# Altium PCB PCB2.PcbDoc
Units mm, origin at the board's own origin, x right, y up, seen from the top; angles counter-clockwise.
Board outline 83.06 x 42.93 mm, 2 copper layers (Top Layer, Bottom Layer); 50 components, 50 nets, 222 pads, 83 vias.
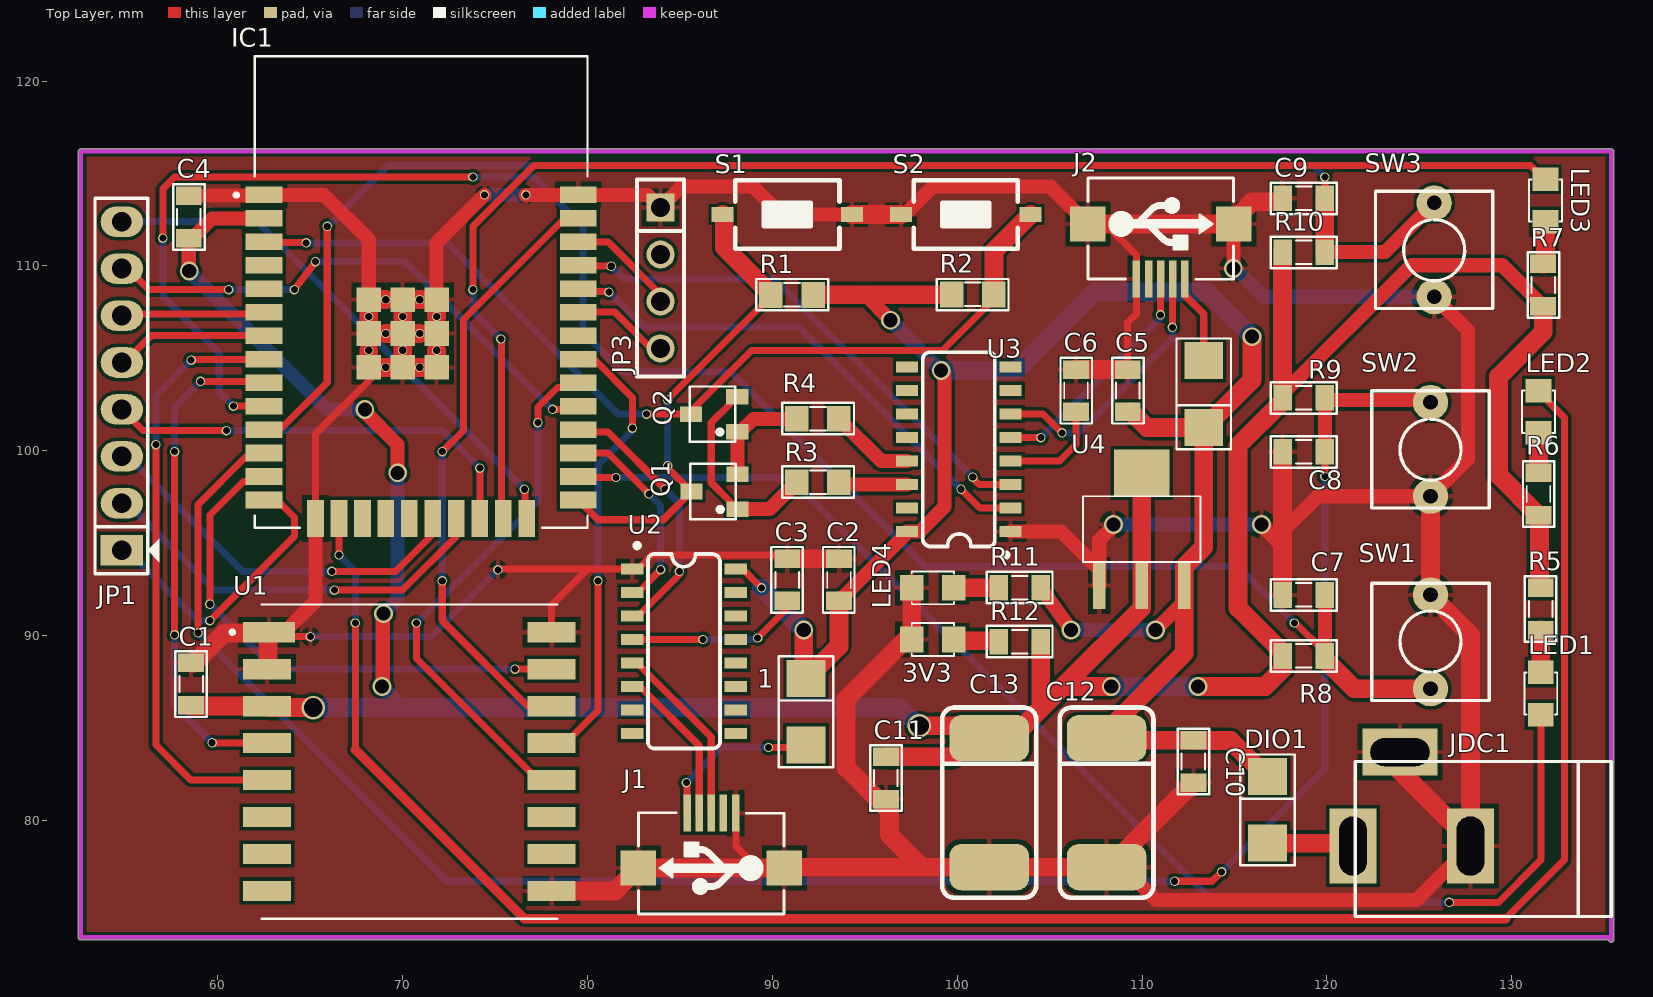
[diagram p0: Top Layer view]
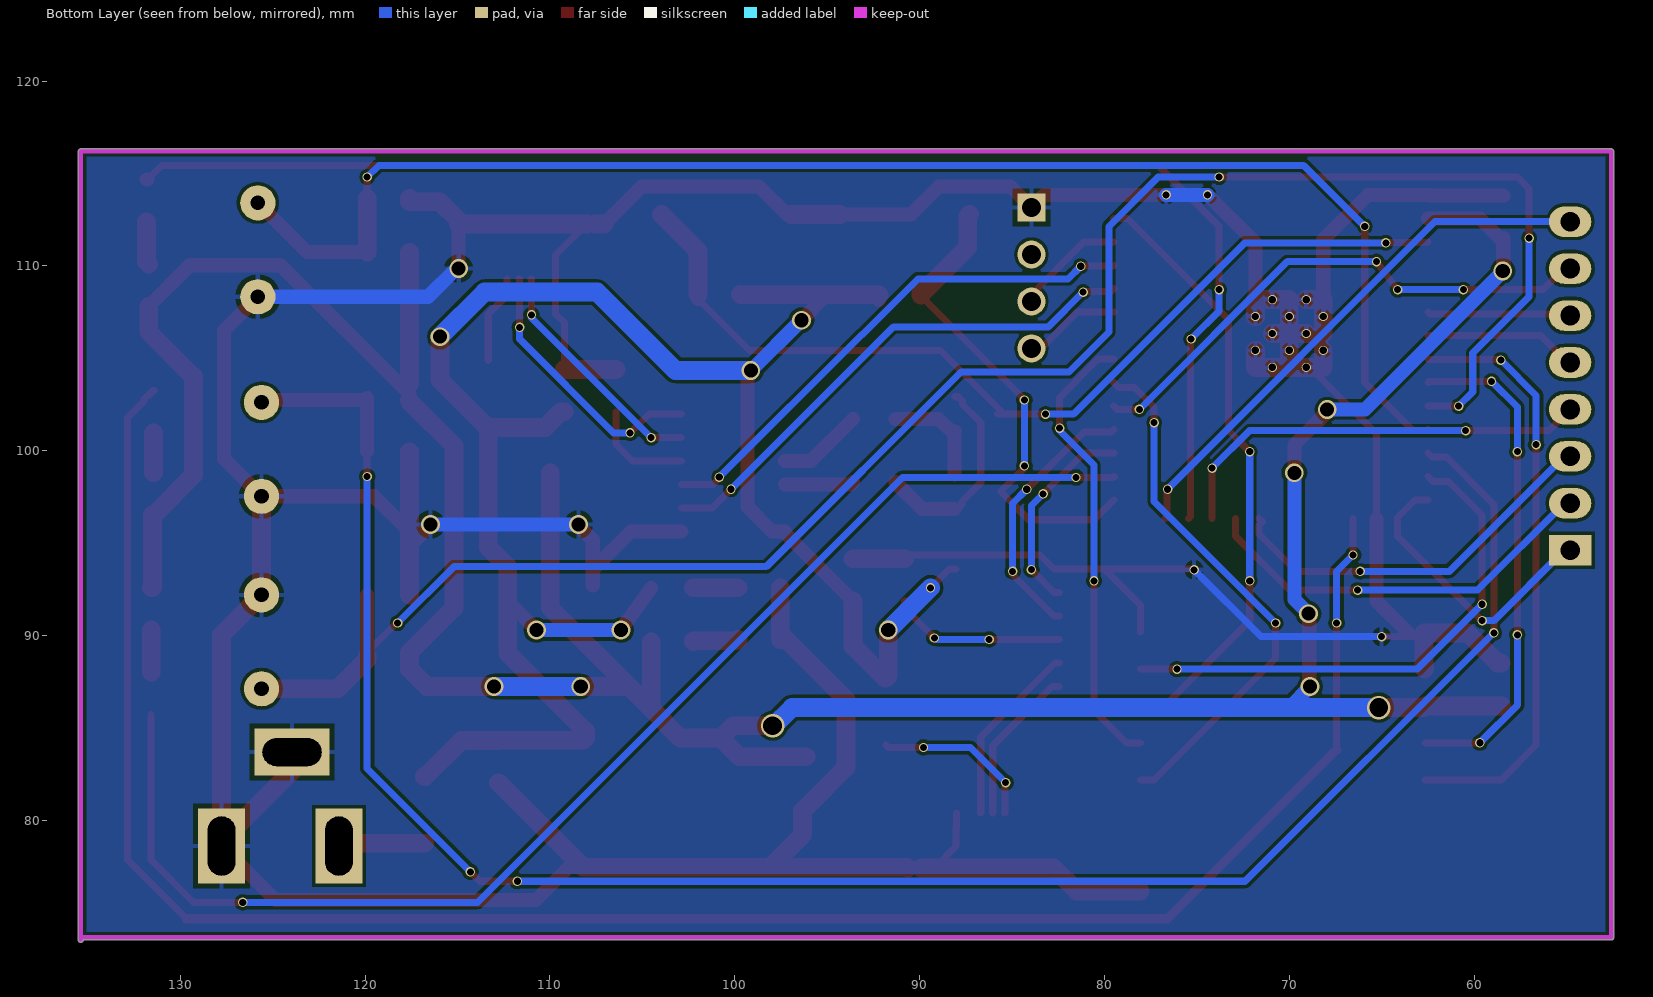
[diagram p1: Bottom Layer view, seen from below]
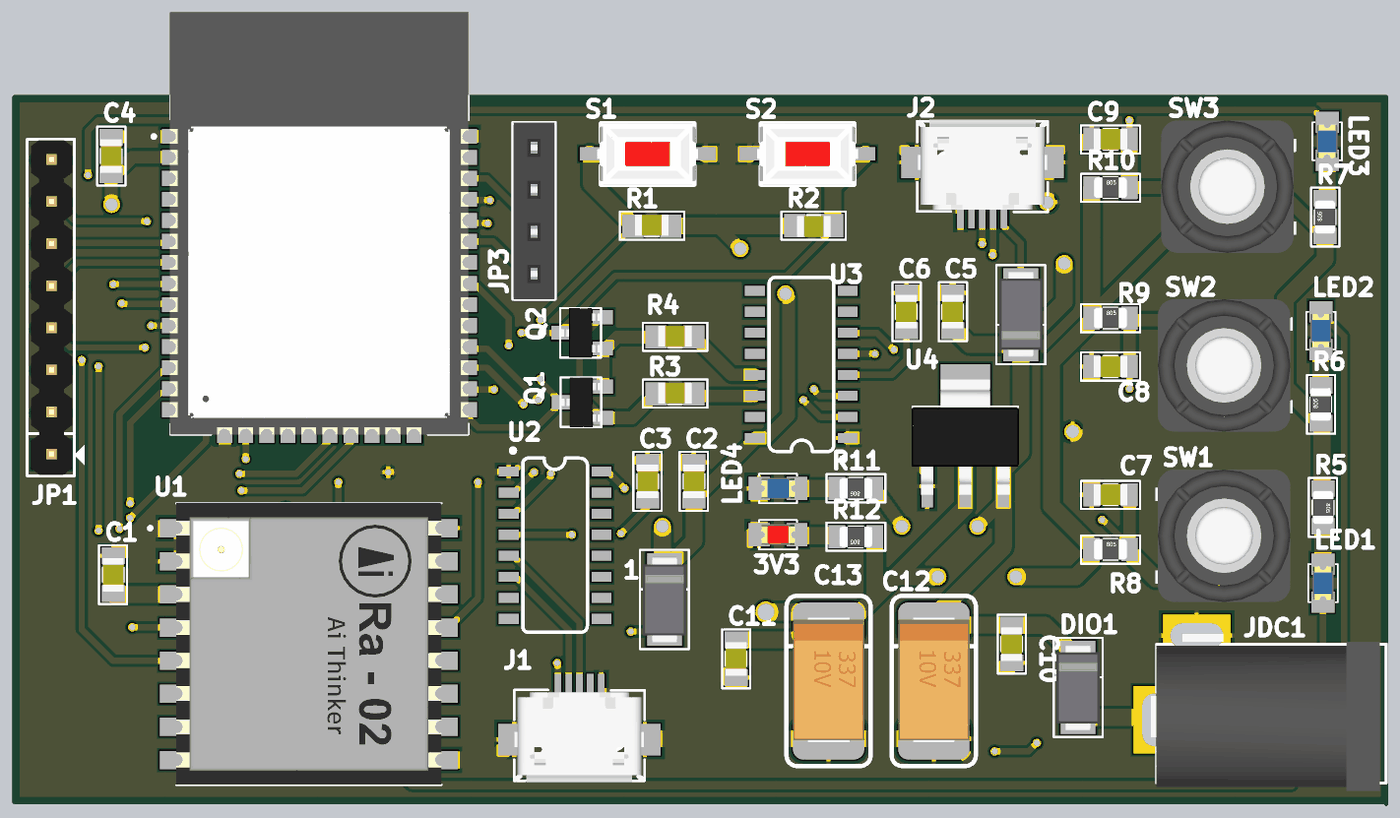
[diagram p2: 3D render of the assembled board from above, using the file's embedded part models]

## Layer stack, top to bottom
Top Solder: solder mask 0.0102, Solder Resist, Dk 3.5
Top Layer: signal copper 0.0356
Dielectric 1: dielectric 0.32, FR-4, Dk 4.8
Bottom Layer: signal copper 0.0356
Bottom Solder: solder mask 0.0102, Solder Resist, Dk 3.5

## Board outline
52.451,73.66 52.451,73.661 52.451,116.205 cw(c52.578,116.205) 52.578,116.332 135.382,116.332 cw(c135.382,116.205) 135.509,116.205 135.509,73.533 cw(c135.382,73.533) 135.255,73.533 52.578,73.533 cw(c52.578,73.66)

## Design rules (kind name [scope] priority, off if disabled: settings)
Clearance [All] p1: gap=0.178 ignorepadtopadclearanceinfootprint=FALSE
PolygonConnect [All] p1: connectstyle=Relief reliefconductorwidth=0.254 reliefentries=4 polygonreliefangle="90 Angle" airgapwidth=0.254
RoutingVias [All] p1: holewidth=0.762 width=1.016 viastyle="Through Hole" minholewidth=0.381 minwidth=0.508 maxholewidth=1.016 maxwidth=1.27
SolderMaskExpansion [All] p1: expansion=0.102
Width [All] p1: maxlimit=1.016 minlimit=0.381 preferedwidth=0.762
30 further rules are at their usual default settings.

## Classes and differential pairs
component class POWER: 3V3 C10 C11 C12 C13 DIO1 JDC1 LED4 R11 R12 U4
component class MCU: C4 C5 C6 C7 C8 C9 IC1 J2 JP1 LED1 LED2 LED3 Q1 Q2 R1 R2 R3 R4 R5 R6 R7 R8 R9 R10 S1 S2 SW1 SW2 SW3
component class LORA: 1 C1 C2 C3 J1 U1 U2
component class HMI: JP3

## Components (designator, comment, footprint, x,y, rotation, side; value= is the part's Value field where it differs from the comment)
1 "S4" DIO-214AC(SMA) 91.872,85.954 r270 top
3V3 "LED" LED-0805-Red 99.822,89.789 r180 top value="LED 3 ly Single Colour" (schematic designator LED5)
C1 "104" CAP_0805 58.547,87.376 r270 top value=33p
C2 "104" CAP_0805 93.599,93.015 r270 top value=33p
C3 "104" CAP_0805 90.805,93.015 r270 top value=33p
C4 "104" CAP_0805 58.42,112.649 r90 top value=33p
C5 "10uF" CAP_0805 109.22,103.251 r90 top value=33p
C6 "100nF" CAP_0805 106.426,103.251 r90 top value=33p
C7 "10uF" CAP_0805 118.745,92.202 r0 top value=33p
C8 "10uF" CAP_0805 118.745,99.949 r0 top value=33p
C9 "10uF" CAP_0805 118.745,113.665 r0 top value=33p
C10 "220nF" CAP_0805 112.776,83.185 r90 top value=33p
C11 "100nF" CAP_0805 96.139,82.296 r90 top value=33p
C12 "220uF" CAP_7343 108.077,81.026 r270 top
C13 "220uF" CAP_7343 101.727,81.026 r270 top
DIO1 "Diode SMD" DIO-214AC(SMA) 116.84,80.645 r270 top value=1N5007
IC1 "ESP32-WROOM-32" MODULE_ESP32-WROOM-32 70.993,108.585 r0 top
J1 "USB-5" USB-M1 86.69,80.391 r180 top
J2 "USB-5" USB-M1 111.011,109.3 r0 top
JDC1 "Jac DC" DC-IN 124.587,81.153 r180 top
JP1 "JP8 PIN" JP8 54.8,94.615 r90 top value=JP7
JP3 "JP4" JP4-C1T 83.947,113.157 r270 top
LED1 "LED" LED-0805-Blue 131.572,88.011 r270 top value="LED 3 ly Single Colour"
LED2 "LED" LED-0805-Blue 131.445,100.965 r90 top value="LED 3 ly Single Colour"
LED3 "LED" LED-0805-Blue 131.826,112.395 r90 top value="LED 3 ly Single Colour"
LED4 "LED" LED-0805-Blue 99.822,92.583 r180 top value="LED 3 ly Single Colour"
Q1 "2SC1815" SOT23D 86.868,97.79 r90 top value=C1815
Q2 "2SC1815" SOT23D 86.848,101.981 r90 top value=C1815
R1 "10k" SM-0805 91.059,108.433 r180 top value=1K
R2 "10K" SM-0805 100.838,108.458 r0 top value=1K
R3 "10K" SM-0805 92.456,98.298 r180 top value=1K
R4 "10k" SM-0805 92.456,101.727 r180 top value=1K
R5 "10K" RES-SMD-0805 131.572,91.44 r270 top
R6 "10K" RES-SMD-0805 131.445,97.663 r90 top
R7 "10K" RES-SMD-0805 131.699,108.966 r90 top
R8 "10K" RES-SMD-0805 118.745,88.9 r0 top
R9 "10K" RES-SMD-0805 118.745,102.87 r0 top
R10 "10K" RES-SMD-0805 118.745,110.744 r0 top
R11 "Resistor - SMD" RES-SMD-0805 103.378,92.583 r180 top
R12 "1K" RES-SMD-0805 103.378,89.662 r180 top
S1 "SW-SMD" SW-SMD 90.805,112.776 r0 top
S2 "SW-SMD" SW-SMD 100.457,112.776 r180 top
SW1 "SW" SW2 125.603,92.202 r270 top value="SW chip 2 pin"
SW2 "SW" SW2 125.603,97.536 r90 top value="SW chip 2 pin"
SW3 "SW" SW2 125.803,108.331 r90 top value="SW chip 2 pin"
U1 "Ra-02 LoRa" Ra-02 70.358,83.185 r0 top
U2 "CH340C" SOP-16 85.217,89.154 r270 top
U3 "CH340C" SOP-16 100.082,100.076 r90 top
U4 "LM1117-ADJ" LM1117-SOP 109.982,93.98 r0 top
? "S4" DIO-214AC(SMA) 113.284,102.997 r90 top

## Footprints (in the part's own frame and the unit in brackets; to place one, negate y for a bottom-side part, rotate by r counter-clockwise, add the part's x,y. Pads: shape width x height; smd on the part's side, far side on the other; paste and mask are expansions set on the pad)
CAP_0805 [mil]
  rect 39.37x55 smd: 1(-45,0) 2(45,0)
  silkscreen extent -70,-34 70,33, body extent -40,-25 40,25, height 24
CAP_7343 [mm] "Capacitor Tantalum 7343"
  rrect50% 2.5x4.3 smd: 1(-3.429,0) 2(3.556,0)
  silkscreen extent -5.08,-2.54 5.21,2.54, body extent -3.75,-2.14 3.75,2.16, height 2.8
DC-IN [mm] "Jac DC input"
  rect 2.54x4.064 hole 1.5 slot 3.2 at 90 deg: 1(3.175,2.54) 2(-3.175,2.54)
  rect 4.064x2.54 hole 1.5 slot 3.2 at 0 deg: 3(0.635,-2.54)
  silkscreen extent -10.8,-2.03 3.05,6.35, body extent -10.42,-2.67 3.4,6.84, height 11.02
DIO-214AC(SMA) [mm] "DO-214AC Diode Smallest Size"
  rect 2x2.1 smd: 1(1.88,-0.051) 2(-1.732,-0.051)
  silkscreen extent -2.92,-1.52 3.07,1.42, body extent -2.5,-1.35 2.7,1.25, height 2.4
JP4-C1T [mm] "4 row, straight, gold plating"
  rect 1.52x1.52 hole 1.02: 1(0,0)
  round 1.52 hole 1.02: 2(2.54,0) 3(5.08,0) 4(7.62,0)
  silkscreen extent -1.52,-1.27 9.14,1.27, body extent -1.52,-1.25 9.14,1.25, height 8.51
JP8 [mil] "JP8"
  rect 65x90 hole 42: 1(0,0)
  oval 65x90 hole 42: 2(100,0) 3(200,0) 4(300,0) 5(400,0) 6(500,0) 7(600,0) 8(700,0)
  silkscreen extent -50,-80 750,57, body extent -48,-50 748,48, height 354
LED-0805-Blue [mil]
  rect 50x55 smd: 1(0,0) 2(90,0)
  silkscreen extent 0,-35 90,35, body extent 5,-25 85,25, height 43
LED-0805-Red [mil]
  rect 50x55 smd: 1(0,0) 2(90,0)
  silkscreen extent 0,-35 90,35, body extent 5,-25 85,25, height 43
LM1117-SOP [mm]
  rect 0.7x2.54 smd: 1(-2.3,-1.27) 2(0,-1.27) 3(2.3,-1.27)
  rect 3x2.54 smd: 2(0,4.826)
  silkscreen extent -3.17,0 3.17,3.56, body extent -3.25,-1.78 3.25,5.18, height 1.68
MODULE_ESP32-WROOM-32 [mm]
  rect 2x0.9 smd: 1(-8.5,5.26) 2(-8.5,3.99) 3(-8.5,2.72) 4(-8.5,1.45) 5(-8.5,0.18) 6(-8.5,-1.09) 7(-8.5,-2.36) 8(-8.5,-3.63) 9(-8.5,-4.9) 10(-8.5,-6.17) 11(-8.5,-7.44) 12(-8.5,-8.71) 13(-8.5,-9.98) 14(-8.5,-11.25) 25(8.5,-11.25) 26(8.5,-9.98) 27(8.5,-8.71) 28(8.5,-7.44) 29(8.5,-6.17) 30(8.5,-4.9) 31(8.5,-3.63) 32(8.5,-2.36) 33(8.5,-1.09) 34(8.5,0.18) 35(8.5,1.45) 36(8.5,2.72) 37(8.5,3.99) 38(8.5,5.26)
  rect 0.9x2 smd: 15(-5.715,-12.25) 16(-4.445,-12.25) 17(-3.175,-12.25) 18(-1.905,-12.25) 19(-0.635,-12.25) 20(0.635,-12.25) 21(1.905,-12.25) 22(3.175,-12.25) 23(4.445,-12.25) 24(5.715,-12.25)
  rect 1.33x1.33 smd: 39_1(-2.835,-0.405) 39_2(-1,-0.405) 39_3(0.835,-0.405) 39_4(-2.835,-2.24) 39_5(-1,-2.24) 39_6(0.835,-2.24) 39_7(-2.835,-4.075) 39_8(-1,-4.075) 39_9(0.835,-4.075)
  round 0.5 hole 0.4: 39_10(-1.917,-0.405) 39_11(-0.082,-0.405) 39_12(-2.835,-1.322) 39_13(-1,-1.322) 39_14(0.835,-1.322) 39_15(-1.917,-2.24) 39_16(-0.082,-2.24) 39_17(-2.835,-3.157) 39_18(-1,-3.157) 39_19(0.835,-3.157) 39_20(-1.917,-4.075) 39_21(-0.082,-4.075)
  silkscreen extent -10.1,-12.75 9,12.75, body extent -10.54,-12.75 8.98,12.75, height 3.2
Ra-02 [mm]
  rect 2.8x1.1 smd: 1(-7.6,7)
  rect 2.6x1.1 smd: 2(-7.7,5) 3(-7.7,3) 4(-7.7,1) 5(-7.7,-1) 6(-7.7,-3) 7(-7.7,-5) 8(-7.7,-7) 9(7.7,-7) 10(7.7,-5) 11(7.7,-3) 12(7.7,-1) 13(7.7,1) 14(7.7,3) 15(7.7,5) 16(7.7,7)
  silkscreen extent -9.68,-8.5 8,8.5, body extent -8,-8.49 8,8.51, height 3.03
RES-SMD-0805 [mil]
  rect 39.37x55 smd: 1(-45,0) 2(45,0)
  silkscreen extent -70,-34 70,33, body extent -39,-25 39,25, height 31
SM-0805 [mil] "Compoment SMD 80x50mil"
  rect 50x55 smd: 1(-45,0) 2(45,0)
  silkscreen extent -77,-34 76,33, body extent -40,-27 40,23, height 24
SOP-16 [mm]
  rect 0.6x1.2 smd: 1(-4.445,-2.8) 2(-3.175,-2.8) 3(-1.905,-2.8) 4(-0.635,-2.8) 5(0.635,-2.8) 6(1.905,-2.8) 7(3.175,-2.8) 8(4.445,-2.8) 9(4.445,2.8) 10(3.175,2.8) 11(1.905,2.8) 12(0.635,2.8) 13(-0.635,2.8) 14(-1.905,2.8) 15(-3.175,2.8) 16(-4.445,2.8)
  silkscreen extent -5.84,-2.67 5.26,1.95, body extent -4.95,-3.47 4.95,3.47, height 1.75
SOT23D [mm] "SOT 23C - 1-3-2 - BCE"
  rect 0.85x1.2 smd: 1(-0.95,-1.25) 2(0.94,-1.245) 3(0,1.25)
  silkscreen extent -1.5,-1.14 1.5,1.32, body extent -1.5,-1.17 1.5,1.33, height 1.06
SW2 [mil] "SW button 2pin, 250x 250 mil"
  round 75 hole 31: 1(0,0) 2(200,0)
  silkscreen extent -25,-125 225,125, body extent -60,-163 255,157, height 257
SW-SMD [mm] "Switch SMD type"
  rect 1.2x0.8 smd: 1(-3.5,0) 2(3.5,0)
  silkscreen extent -2.82,-1.85 2.82,1.85, body extent -3.05,-1.85 3.05,1.85, height 2.5
USB-M1 [mm]
  rect 0.4x2 smd: 1(1.3,0) 2(0.65,0) 3(0,0) 4(-0.65,0) 5(-1.321,0)
  rect 1.9x1.9 smd: 5(-3.95,2.968) 5(3.95,2.968)
  silkscreen extent -3.94,-0.03 3.94,5.46, body extent -3.98,0.11 4,5.54, height 2.71

## Part data
1 ?: library part "Diode S4", "Dán", Chung_Loai=Dán, Don_Vi=Con, Ma_Hang=MH005519, Ten_Linh_Kien="Diode S4 SOD123 ( 1N5819 SOD123)"
3V3 LED1 LED2 LED3 LED4: "LED Single colour Green and Red"
C1 C2 C3 C4 C5 C6 C7 C8 C9 C10 C11: library part CapSMD, "Capacitor", LatestRevisionDate=17-Jul-2002, LatestRevisionNote="Re-released for DXP Platform.", PackageReference=RAD-0.3, Published=8-Jun-2000, Publisher="Altium Limited"
C12 C13: library part CAP_TAN_SMD, "Polazied Tantalum Capacitor"
DIO1: "Default Diode", Code - JEDEC=DO-214-AB, Published=8-Jun-2000, Publisher="Altium Limited", Revision="July-2002: Re-released for DXP Platform."
IC1: "Bluetooth, WiFi Transceiver Module 2.4GHz ~ 2.5GHz Surface Mount", Package="Module Espressif Systems", Digi-Key_Part_Number=1904-1010-1-ND, Digi-Key_Purchase_URL=https://www.digikey.com/product-detail/en/espressif-systems/ESP32-WROOM-32/1904-1010-1-ND/8544305?utm_source=snapeda&utm_medium=aggregator&utm_campaign=symbol, MF="Espressif Systems", MP=ESP32-WROOM-32, SnapEDA_Link=https://www.snapeda.com/parts/ESP32-WROOM-32/Espressif%20Systems/view-part/2753322/?ref=snap
J1 J2: Manufacturer=FCI, Manufacturer Part Number=10118193-0001LF, Supplier Part Number 1=609-4616-1-ND, .Checked PCB=RF, .Checked SCH=MM, .Creator=MM, Category="Connectors, Interconnects", ComponentLink1Description=http://portal.fciconnect.com/Comergent//fci/drawing/10118193.pdf, ComponentLink1URL=http://portal.fciconnect.com/Comergent//fci/drawing/10118193.pdf, Connector Type="USB - micro B", Features="Shielded, Solder Retention", Gender=Receptacle, Ingress Protection=-, Mounting Type="Surface Mount, Right Angle, Horizontal", Number of Contacts=5, Packaging="Cut Tape (CT)", Pricing 1="1=0.46, 10=0.433, 25=0.3712, 50=0.3156, 100=0.3032, 250=0.27224, 500=0.25988 (USD)", RoHS="RoHS Compliant", Specifications="USB 2.0", Stock 1=28642, Supplier 1=Digi-Key
JDC1: library part DCIN, "Jac DC input"
JP1: library part JP8
JP3: "WR-PHD 2.54 mm Angled Socket Header", Manufacturer="W¨¹rth Elektronik eiSos GmbH", partNo=613004143121, ComponentLink1 Description=Manufacturer, ComponentLink1URL=http://www.we-online.com, ComponentLink2 Description=Datasheet, ComponentLink2URL=http://katalog.we-online.de/em/datasheet/6130xx143121.pdf, Created by="Karrer Zheng", Created Date="29 March 2013", NoPins=04
Q1 Q2: library part C1815, "NPN 600mW, ECB", =C828
R1 R2 R3 R4: library part RM, "Resistor SMD"
R5 R6 R7 R8 R9 R10 R12: library part "Resistor - SMD", "Resistor SMD", Manufacturer="Generic Components", Class=Passive, Published=08/06/2000, Publisher="Altium Hobart Technology Centre"
R11: "Resistor SMD", Manufacturer="Generic Components", Class=Passive, Published=08/06/2000, Publisher="Altium Hobart Technology Centre"
S1 S2: "Switch", LatestRevisionDate=17-Jul-2002, LatestRevisionNote="Re-released for DXP Platform.", PackageReference=SPST-2, Published=24-Mar-1999, Publisher="Altium Limited"
SW1 SW2 SW3: library part SW2, "Switch button 2 pin"
U1: "LoRa Module Ra-02"
U2 U3: "USB to serial chip CH340", Package=Package, Availability=Unavailable, Check_prices=https://www.snapeda.com/parts/CH340C/WCH/view-part/5428851/?ref=eda, MF=WCH, MP=CH340C, Price=None, SnapEDA_Link=https://www.snapeda.com/parts/CH340C/WCH/view-part/5428851/?ref=snap
U4: "800mA Low-Dropout Linear Regulator", Creator="Nguyen Ba Bien", Website=http://group3i.net

## Via types
v1: diameter 0.508, hole 0.381, Top Layer to Bottom Layer, 65 vias
v2: diameter 1.016, hole 0.762, Top Layer to Bottom Layer, 16 vias
v3: diameter 1.27, hole 1.016, Top Layer to Bottom Layer, 2 vias

## Nets (pads, with @x,y where several pads share a name; then routed paths per layer and width w, separated by ;. In a path a pad name is that pad's centre, name@x,y a point inside that pad or via, vN(x,y) a via of type N, cw(c..) or ccw(c..) an arc to the next point about the centre after c; other vN are vias at no path point)
3V3: C1.2 C4.1 C11.2 C13.1 IC1.2 R5.1 R6.1 R7.1 R8.1 R9.1 R10.1 R12.1 U1.3 U4.2 | length 179.2
  Top Layer w0.381: C1.2@58.499,86.185 C1.2
  Top Layer w0.762: v2(58.447,109.728) 58.42,109.755 C4.1 58.618,111.506 59.688,112.575 IC1.2 ; v2(67.945,102.235) 67.945,102.108 69.723,100.33 v2(69.723,98.806) ; v2(68.87,87.249) 68.916,87.295 68.916,91.141 v2(68.961,91.186) ; R9.1@117.602,102.687 R9.1 117.602,103.068 124.568,110.035 129.487,110.035 R7.1
  Top Layer w1.016: C1.2@58.499,86.185 U1.3 62.737,86.106 v3(65.151,86.106) ; C11.2 99.748,83.439 C13.1@100.764,84.455 ; v3(97.952,85.125) 100.094,85.125 C13.1@100.764,84.455 ; R12.1 104.521,86.03 ; v2(108.331,87.249) 105.74,87.249 ; U4.2@109.982,98.806 109.982,92.71 109.982,91.491 105.74,87.249 ; v2(113.03,87.249) 116.662,87.249 117.594,88.181 117.594,88.892 R8.1 117.602,89.083 115.189,91.496 115.189,100.275 R9.1@117.602,102.687 ; 117.602,103.632 R10.1 ; R5.1 131.516,92.583 131.508,92.591 131.508,96.512 131.501,96.52 R6.1 129.286,98.679 129.286,104.013 131.699,106.426 R7.1 ; C13.1@100.764,84.455 C13.1 102.946,84.455 104.521,86.03 ; 104.521,86.03 105.74,87.249
  Bottom Layer w0.762: v2(58.447,109.728) 58.447,109.695 65.907,102.235 v2(67.945,102.235) ; v2(68.87,87.249) 68.87,87.229 69.993,86.106 ; v2(68.961,91.186) 69.723,91.948 v2(69.723,98.806)
  Bottom Layer w1.016: v3(65.151,86.106) 69.993,86.106 96.902,86.106 97.883,85.125 v3(97.952,85.125) ; v2(108.331,87.249) v2(113.03,87.249)
+3V3: JP3.2
+5V: 1.2 ?.2 C2.2 C5.1 C10.2 C12.1 DIO1.2 R1.1 R2.1 R11.1 U2.16 U3.16 U4.3 | length 109.6
  Top Layer w0.381: U2.16 88.392,93.599 v1(89.408,92.583)
  Top Layer w0.762: R1.1@92.202,108.152 R1.1 ; C2.2 97.282,95.555 U3.16 97.975,95.631 99.314,96.97 99.314,104.15 v2(99.129,104.336) ; 94.869,108.445 95.009,108.445 v2(96.393,107.061) ; R11.1 v2(106.155,90.297) ; v2(110.727,90.297) U4.3@112.282,91.852
  Top Layer w1.016: v2(91.694,90.297) 91.694,87.813 1.2 91.871,87.686 93.599,89.414 C2.2 ; R1.1 92.215,108.445 94.869,108.445 ; 95.009,108.445 99.682,108.445 R2.1 ; C5.1 109.403,102.108 110.246,101.265 ?.2 ; U4.3@112.282,91.708 112.282,89.041 108.077,84.836 C12.1 108.196,84.336 112.768,84.336 C10.2 112.784,84.32 114.797,84.32 116.739,82.377 DIO1.2 ; U4.3@112.282,91.852 U4.3 112.282,93.732 113.335,94.785 ?.2 ; v2(115.951,106.172) 115.951,103.831 113.385,101.265 ?.2
  Bottom Layer w0.762: v2(96.393,107.061) 96.403,107.061 v2(99.129,104.336) ; v2(106.155,90.297) v2(110.727,90.297)
  Bottom Layer w1.016: v1(89.408,92.583) v2(91.694,90.297) ; v2(99.129,104.336) 103.193,104.336 107.442,108.585 113.538,108.585 v2(115.951,106.172)
GND: 3V3.2 C1.1 C2.1 C3.1 C4.2 C5.2 C6.2 C7.1 C8.1 C9.1 C10.1 C11.1 C12.2 C13.2 IC1.1 IC1.15 IC1.38 IC1.39_1 IC1.39_2 IC1.39_3 IC1.39_4 IC1.39_5 IC1.39_6 IC1.39_7 IC1.39_8 IC1.39_9 IC1.39_10 IC1.39_11 IC1.39_12 IC1.39_13 IC1.39_14 IC1.39_15 IC1.39_16 IC1.39_17 IC1.39_18 IC1.39_19 IC1.39_20 IC1.39_21 J1.5 J2.5 JDC1.2 JDC1.3 JP3.1 LED4.2 S1.2 S2.2 SW1.1 SW2.1 SW3.1 U1.1 U1.2 U1.9 U1.16 U2.1 U3.1 U4.1 | length 326.2
  Top Layer w0.381: U1.2 U1.2@62.666,88.185 ; U1.1@62.708,90.143 62.911,89.94 63.608,89.94 v1(65,89.94) ; IC1.15 65.278,100.918 68.514,104.154 68.87,104.51 IC1.39_20 ; v1(75.144,93.559) 75.184,93.599 80.01,93.599 ; U1.16 78.058,91.647 80.01,93.599 ; J1.5@88.011,80.391 88.011,79.591 88.02,79.581 88.02,78.604 89.201,77.423 ; J1.5@89.916,77.423 J1.5@90.64,77.423 ; C3.1 90.602,94.361 83.479,94.361 82.717,93.599 U2.1 80.01,93.599 ; J2.5@107.552,112.268 108.006,112.268 109.69,110.584 109.69,109.3 109.69,107.404 109.22,106.934 C5.2
  Top Layer w0.762: C4.2 58.447,113.818 62.466,113.818 IC1.1 65.733,113.845 68.158,111.42 IC1.39_1 ; U1.1@63.608,90.185 65.278,91.855 IC1.15 ; IC1.39_3 71.828,111.251 v1(74.422,113.845) ; v1(76.655,113.845) IC1.38 83.259,113.845 JP3.1 85.09,114.3 88.953,114.3 90.477,112.776 S1.2 ; S2.2 97.157,112.776 98.681,114.3 105.029,114.3 J2.5@107.061,112.268 ; U3.1 105.619,95.631 U4.1@107.682,93.568 ; U4.1 U4.1@107.682,93.568 ; C12.2 108.204,77.47 108.977,77.47 110.755,75.692 124.841,75.692 127.381,78.232 127.762,77.851 127.762,78.232 JDC1.2 ; v2(108.458,96.012) 108.458,95.943 107.682,95.167 U4.1@107.682,93.568 ; v2(114.935,109.855) 114.948,109.868 114.948,112.255 J2.5@114.961,112.268 ; v2(116.459,96.012) 116.459,95.963 117.602,94.82 117.602,94.785 ; 117.602,95.631 119.507,97.536 SW2.1 127.635,99.568 127.635,106.499 SW3.1
  Top Layer w1.016: C1.1 58.73,88.519 60.353,90.143 62.708,90.143 62.708,88.227 U1.2@62.666,88.185 ; IC1.39_17 IC1.39_7 IC1.39_20@68.87,104.51 ; IC1.39_4@68.163,106.345 68.158,106.34 IC1.39_4 IC1.39_12 IC1.39_1 IC1.39_10 ; IC1.39_20 IC1.39_8 ; IC1.39_15 IC1.39_5 ; IC1.39_16 IC1.39_5 ; IC1.39_19 IC1.39_9 IC1.39_21 IC1.39_8 ; IC1.39_14 IC1.39_3 IC1.39_11 IC1.39_2 IC1.39_13 IC1.39_5 ; U1.9 81.502,76.185 82.74,77.423 89.201,77.423 J1.5@89.916,77.423 ; J1.5@90.64,77.423 90.687,77.47 98.09,77.47 ; C3.1 C2.1 ; S1.2 S2.2 ; LED4.2 3V3.2 97.211,89.789 93.98,86.558 93.98,82.867 95.917,80.931 96.329,80.518 96.329,79.231 98.09,77.47 ; C6.2 C5.2 ; J2.5@107.061,112.268 J2.5@107.552,112.268 ; J2.5@108.006,112.268 114.961,112.268 114.961,112.485 115.951,113.474 117.594,113.474 117.602,113.482 C9.1 ; C12.2 C13.2 98.09,77.47 ; C12.2@108.204,77.47 C10.1 ; C7.1 117.602,94.785 ; 117.602,94.82 117.602,95.631 C8.1 ; JDC1.3 124.714,83.693 123.825,82.804 127.762,78.867 JDC1.2 ; SW2.1 SW1.1 127.762,90.043 JDC1.2@127.762,79.375 ; IC1.39_8 IC1.39_18 IC1.39_5
  Bottom Layer w0.381: v1(65,89.94) 71.525,89.94 v1(75.144,93.559)
  Bottom Layer w0.762: v1(74.422,113.845) v1(76.655,113.845) ; v2(108.458,96.012) v2(116.459,96.012) ; v2(114.935,109.855) 115.062,109.855 116.586,108.331 SW3.1
GPIO0: IC1.25 Q1.3 R1.2 S1.1 | length 26.1
  Top Layer w0.381: IC1.25 80.562,96.266 84.094,96.266 Q1.3 84.352,99.056 84.352,99.163 v1(84.328,99.187) ; v1(84.328,102.743) 84.328,102.781 89.916,108.369 R1.2
  Top Layer w1.016: S1.1 87.397,112.684 87.397,111.015 89.916,108.496 R1.2
  Bottom Layer w0.381: v1(84.328,99.187) v1(84.328,102.743)
GPIO2: IC1.24 JP1.8 | length 29.6
  Top Layer w0.381: JP1.8 JP1.8@54.991,112.395 ; v1(76.581,97.917) 76.605,97.893 76.605,96.438 IC1.24
  Bottom Layer w0.381: JP1.8 62.103,112.395 v1(76.581,97.917)
GPIO4: IC1.26 LED1.2 | length 70.5
  Top Layer w0.381: IC1.26@79.464,98.576 IC1.26 79.546,98.552 v1(81.534,98.552) ; v1(126.619,75.565) 129.286,75.565 131.572,77.851 LED1.2
  Bottom Layer w0.381: v1(81.534,98.552) 90.932,98.552 113.919,75.565 v1(126.619,75.565)
GPIO5: IC1.29 JP1.7 | length 30.9
  Top Layer w0.381: JP1.7@54.91,110.258 54.26,110.435 54.643,109.765 55.208,109.765 56.261,108.712 v1(60.579,108.712) ; v1(64.135,108.712) v1(65.278,110.236) ; v1(78.105,102.235) 79.313,102.235 IC1.29
  Bottom Layer w0.381: v1(60.579,108.712) v1(64.135,108.712) ; v1(65.278,110.236) 70.104,110.236 v1(78.105,102.235)
GPIO12: IC1.14 JP1.1 | length 15.9
  Top Layer w0.381: v1(59.563,90.805) 64.135,95.377 64.135,96.393 63.193,97.335 IC1.14
  Bottom Layer w0.381: JP1.1 55.118,94.615 58.928,90.805 v1(59.563,90.805)
GPIO13: IC1.16 LED2.2 | length 109.8
  Top Layer w0.381: v1(66.548,94.361) IC1.16 ; 67.437,83.82 v1(67.437,90.678) ; 129.667,74.676 132.842,77.851 132.842,101.79 131.953,102.679 131.953,102.806 131.508,103.251 LED2.2 ; LED2.2@131.381,103.251 LED2.2 ; LED2.2@131.699,102.997 LED2.2
  Top Layer w0.508: 67.437,83.82 76.581,74.676 129.667,74.676
  Bottom Layer w0.381: v1(66.548,94.361) 67.437,93.472 v1(67.437,90.678)
GPIO15: IC1.23 LED3.2 | length 76.2
  Top Layer w0.381: v1(73.787,108.712) 73.787,112.141 77.089,115.443 131,115.443 LED3.2@131.762,114.681 ; v1(75.311,106.045) 75.335,106.021 75.335,96.438 IC1.23
  Top Layer w0.762: LED3.2@131.762,114.681 LED3.2
  Bottom Layer w0.381: v1(73.787,108.712) 73.787,107.569 v1(75.311,106.045)
GPIO21: IC1.33 JP3.4 | length 5.3
  Top Layer w0.381: IC1.33 81.481,107.495 83.439,105.537 JP3.4
GPIO22: IC1.36 JP3.3 | length 6
  Top Layer w0.381: IC1.36 81.1,111.305 83.947,108.458 JP3.3
GPIO25: C7.2 IC1.10 R8.2 SW1.2 | length 102
  Top Layer w0.381: v1(57.023,111.506) 57.023,114.173 57.658,114.808 v1(73.787,114.808) ; v1(60.833,102.415) IC1.10 ; v1(118.237,90.678) 118.308,90.678 119.888,89.098 R8.2
  Top Layer w0.762: R8.2@119.888,89.098 C7.2
  Top Layer w1.016: R8.2 119.888,88.717 121.483,87.122 SW1.2
  Bottom Layer w0.381: v1(57.023,111.506) 57.023,108.331 60.071,105.283 60.071,103.177 v1(60.833,102.415) ; v1(73.787,114.808) 77.089,114.808 79.756,112.141 79.756,106.426 81.915,104.267 87.757,104.267 98.298,93.726 115.189,93.726 v1(118.237,90.678)
GPIO26: C9.2 IC1.11 R10.2 SW3.2 | length 79.7
  Top Layer w0.381: IC1.11 62.546,101.092 63.303,101.092 65.913,103.702 v1(65.913,112.141) ; C9.2 v1(119.888,114.808)
  Top Layer w0.762: R10.2 123.136,110.744 SW3.2
  Top Layer w1.016: R10.2 C9.2
  Bottom Layer w0.381: v1(65.913,112.141) 69.215,115.443 119.253,115.443 v1(119.888,114.808)
GPIO27: C8.2 IC1.12 R9.2 SW2.2 | length 106.6
  Top Layer w0.381: v1(58.928,90.143) 58.928,97.081 61.499,99.652 62.27,99.652 IC1.12 ; v1(111.76,76.708) 113.792,76.708 v1(114.3,77.216) ; v1(119.888,98.605) C8.2
  Top Layer w0.762: C8.2 119.888,102.862 120.007,102.743 125.476,102.743 SW2.2
  Bottom Layer w0.381: v1(58.928,90.143) 58.955,90.143 72.39,76.708 84.548,76.708 v1(111.76,76.708) ; v1(114.3,77.216) 119.888,82.804 v1(119.888,98.605)
GPIO34: IC1.6 JP1.6 | length 7.8
  Top Layer w0.381: JP1.6 54.89,107.405 62.403,107.405 IC1.6
GPIO35: IC1.7 JP1.5 | length 8.3
  Top Layer w0.381: JP1.5 54.92,104.775 56.37,106.225 IC1.7
Net1_1: 1.1 J1.1 | length 9
  Top Layer w0.381: v1(85.344,82.042) 85.344,81.915 85.381,81.878 85.381,80.4 J1.1 ; v1(89.789,83.947) 91.694,83.947 1.1
  Bottom Layer w0.381: v1(85.344,82.042) 87.249,83.947 v1(89.789,83.947)
Net3V3_1: 3V3.1 R12.2 | length 2.5
  Top Layer w1.016: 3V3.1 99.885,89.725 102.227,89.725 102.235,89.718 R12.2
Net_1: ?.1 J2.1 | length 4.8
  Top Layer w0.381: J2.1 112.311,108.415 113.335,107.391 ?.1
NetC3_2: C3.2 U2.4 | length 9.8
  Top Layer w0.381: U2.4 v1(86.233,89.789) ; v1(89.201,89.87) 90.904,91.574 90.706,91.773 90.607,91.872 C3.2
  Bottom Layer w0.381: v1(86.233,89.789) 89.12,89.789 v1(89.201,89.87)
NetC6_1: C6.1 U3.4 | length 5.7
  Top Layer w0.381: U3.4 105.537,99.441 106.426,100.33 C6.1
NetDIO1_1: DIO1.1 JDC1.1 | length 4.7
  Top Layer w1.016: DIO1.1 121.26,78.765 JDC1.1
NetIC1_8: IC1.8 U1.5 | length 32.4
  Top Layer w0.381: v1(56.642,100.33) 56.642,84.074 58.531,82.185 U1.5 ; v1(58.547,104.902) 58.571,104.926 62.464,104.926 IC1.8
  Bottom Layer w0.381: v1(56.642,100.33) 56.642,102.997 v1(58.547,104.902)
NetIC1_9: IC1.9 U1.4 | length 27.4
  Top Layer w0.381: v1(57.658,90.043) v1(57.658,99.949) ; v1(59.055,103.759) 59.079,103.735 62.443,103.735 IC1.9 ; v1(59.69,84.201) 59.698,84.193 62.65,84.193 U1.4
  Bottom Layer w0.381: v1(57.658,90.043) 57.658,86.233 v1(59.69,84.201) ; v1(57.658,99.949) 57.658,102.362 v1(59.055,103.759)
NetIC1_13: IC1.13 U1.15 | length 28.6
  Top Layer w0.381: v1(59.563,91.694) 59.563,96.52 61.388,98.345 62.233,98.345 IC1.13 ; v1(76.073,88.185) U1.15
  Bottom Layer w0.381: v1(59.563,91.694) 63.072,88.185 v1(76.073,88.185)
NetIC1_27: IC1.27 U2.2 | length 11.1
  Top Layer w0.381: IC1.27 81.1,99.875 v1(83.312,97.663) ; U2.2 82.717,92.329 83.947,93.559 v1(83.947,93.568)
  Bottom Layer w0.381: v1(83.312,97.663) 83.947,97.028 v1(83.947,93.568)
NetIC1_28: IC1.28 U2.3 | length 14.4
  Top Layer w0.381: IC1.28 79.619,101.019 81.099,101.019 v1(84.201,97.917) ; U2.3 82.717,91.059 84.963,93.305 v1(84.963,93.472)
  Bottom Layer w0.381: v1(84.201,97.917) 84.963,97.155 v1(84.963,93.472)
NetIC1_30: IC1.30 U1.12 | length 29.1
  Top Layer w0.381: v1(70.739,90.678) 70.739,88.754 77.308,82.185 U1.12 ; v1(77.308,101.518) 77.308,102.365 78.368,103.425 79.233,103.425 IC1.30
  Bottom Layer w0.381: v1(70.739,90.678) 77.308,97.247 v1(77.308,101.518)
NetIC1_31: IC1.31 U1.13 | length 24.7
  Top Layer w0.381: U1.13 78.808,84.185 80.562,85.939 v1(80.562,92.964) ; IC1.31 80.338,104.955 82.423,102.87 v1(82.423,101.219)
  Bottom Layer w0.381: v1(80.562,92.964) 80.562,99.231 82.423,101.092 v1(82.423,101.219)
NetIC1_37: IC1.37 U1.14 | length 33.1
  Top Layer w0.381: v1(72.136,92.964) 72.136,90.805 76.756,86.185 U1.14 ; v1(72.136,99.949) 73.279,101.092 73.279,107.102 78.752,112.575 IC1.37
  Bottom Layer w0.381: v1(72.136,92.964) v1(72.136,99.949)
NetJ1_2: J1.2 U2.6 | length 8.6
  Top Layer w0.381: U2.6 82.828,87.249 86.04,84.037 J1.2
NetJ1_3: J1.3 U2.5 | length 10.1
  Top Layer w0.381: U2.5 82.677,88.519 86.69,84.506 J1.3
NetJ2_2: J2.2 U3.6 | length 14.5
  Top Layer w0.381: U3.6 104.648,101.981 v1(105.664,100.965) ; v1(111.633,106.68) 111.652,106.699 111.652,109.291 J2.2
  Bottom Layer w0.381: v1(105.664,100.965) 106.553,100.965 111.633,106.045 v1(111.633,106.68)
NetJ2_3: J2.3 U3.5 | length 12.9
  Top Layer w0.381: U3.5 v1(104.521,100.711) ; v1(110.998,107.349) 111.005,107.356 111.005,109.294 J2.3
  Bottom Layer w0.381: v1(104.521,100.711) 110.998,107.188 v1(110.998,107.349)
NetLED1_1: LED1.1 R5.2 | length 2.3
  Top Layer w1.016: LED1.1 R5.2
NetLED2_1: LED2.1 R6.2 | length 2.2
  Top Layer w1.016: R6.2 LED2.1
NetLED3_1: LED3.1 R7.2 | length 2.3
  Top Layer w1.016: R7.2 131.826,110.236 LED3.1
NetLED4_1: LED4.1 R11.2 | length 2.4
  Top Layer w1.016: LED4.1 R11.2
NetQ1_1: Q1.1 Q2.2 R3.2 | length 11.3
  Top Layer w0.381: Q2.2 87.918,102.921 87.683,102.686 87.683,102.511 86.69,101.518 86.69,98.268 87.709,97.249 87.709,97.074 87.943,96.84 Q1.1
  Top Layer w0.762: Q1.1 89.855,96.84 R3.2
NetQ1_2: Q1.2 Q2.1 R4.2 | length 5.8
  Top Layer w0.381: Q1.2@88.093,98.71 88.105,98.723 Q1.2
  Top Layer w0.762: Q1.2@88.105,98.723 88.105,101.024 Q2.1 88.273,101.031 88.969,101.727 R4.2
NetR3_1: R3.1 U3.14 | length 3.7
  Top Layer w0.762: R3.1 93.726,98.171 U3.14
NetR4_1: R4.1 U3.13 | length 4.6
  Top Layer w0.762: R4.1 95.885,99.441 U3.13
nRST: IC1.3 Q2.3 R2.2 S2.1 | length 51.7
  Top Layer w0.381: IC1.3 62.522,111.276 64.746,111.276 v1(64.77,111.252) ; v1(83.185,101.981) Q2.3 85.773,101.981 85.598,102.156 88.869,105.428 99.205,105.428 R2.2@101.981,108.204
  Top Layer w0.762: R2.2@101.981,108.204 R2.2
  Top Layer w1.016: R2.2 101.981,110.8 S2.1
  Bottom Layer w0.381: v1(64.77,111.252) 72.39,111.252 81.661,101.981 v1(83.185,101.981)
RX0: IC1.34 U3.2 | length 28.3
  Top Layer w0.381: IC1.34 79.649,108.609 81.129,108.609 v1(81.153,108.585) ; v1(100.203,97.917) 101.219,96.901 U3.2
  Bottom Layer w0.381: v1(81.153,108.585) 83.039,106.699 91.421,106.699 v1(100.203,97.917)
SCK: IC1.20 JP1.3 | length 21.4
  Top Layer w0.381: JP1.3 JP1.3@54.991,99.695 ; v1(66.167,93.472) 69.596,93.472 71.628,95.504 71.628,95.978 71.45,96.157 IC1.20
  Bottom Layer w0.381: JP1.3 55.118,99.695 61.341,93.472 v1(66.167,93.472)
SD0: IC1.21 JP1.2 | length 22.2
  Top Layer w0.381: v1(66.294,92.456) 69.977,92.456 72.898,95.377 IC1.21
  Bottom Layer w0.381: JP1.2 55.118,97.155 59.817,92.456 v1(66.294,92.456)
SDI: IC1.22 JP1.4 | length 23.4
  Top Layer w0.381: JP1.4 55.944,101.092 v1(60.452,101.092) ; IC1.22 v1(74.168,99.06)
  Bottom Layer w0.381: v1(60.452,101.092) 72.136,101.092 v1(74.168,99.06)
TX0: IC1.35 U3.3 | length 28.3
  Top Layer w0.381: IC1.35 79.522,110.006 81.256,110.006 v1(81.28,109.982) ; v1(100.838,98.576) 100.838,98.542 100.965,98.415 100.965,98.394 101.188,98.171 U3.3
  Bottom Layer w0.381: v1(81.28,109.982) 81.962,109.3 90.09,109.3 93.091,106.299 93.115,106.299 v1(100.838,98.576)
pads on no net: IC1.4 IC1.5 IC1.17 IC1.18 IC1.19 IC1.32 J1.4 J2.4 U1.6 U1.7 U1.8 U1.10 U1.11 U2.7 U2.8 U2.9 U2.10 U2.11 U2.12 U2.13 U2.14 U2.15 U3.7 U3.8 U3.9 U3.10 U3.11 U3.12 U3.15

## Polygon pours and split planes (outlines as drawn)
GND on Top Layer "Top Layer-GND" (solid, remove dead copper, pour order 12): 52.578,116.205 135.382,116.205 135.382,73.533 135.255,73.66 52.578,73.66 52.578,116.205
no net on Top Layer "Top Layer-No Net 1" (solid, pour order 10): 52.578,116.205
no net on Top Layer "Top Layer-No Net" (solid, pour order 0): 48.514,116.713
GND on Bottom Layer "Bottom Layer-GND" (solid, remove dead copper, pour order 14): 135.382,116.205 135.382,73.66 52.578,73.66 52.578,116.205

## Keep-outs
Keep-Out Layer:
  lines w0.254: 135.382,73.533 135.382,74.295 ; 135.382,73.724 135.382,116.205 52.578,116.205 52.578,73.66 73.279,73.66 114.681,73.66 135.382,73.66 135.382,73.736

## Text inside footprints (layer, text, board x,y; h text height)
IC1: Mechanical 13 "ANTENNA" at 64.993,117.077 h1.02